# Altium PCB Solens.PcbDoc (part 3 of 3)
Units mil, origin at the board's own origin, x right, y up, seen from the top; angles counter-clockwise.
Board outline 5511.81 x 2755.91 mil, 4 copper layers (Top Layer, Signal Layer 2, Signal Layer 1, Bottom Layer), stack 65.08 mil thick; 208 components, 216 nets, 806 pads, 433 vias.
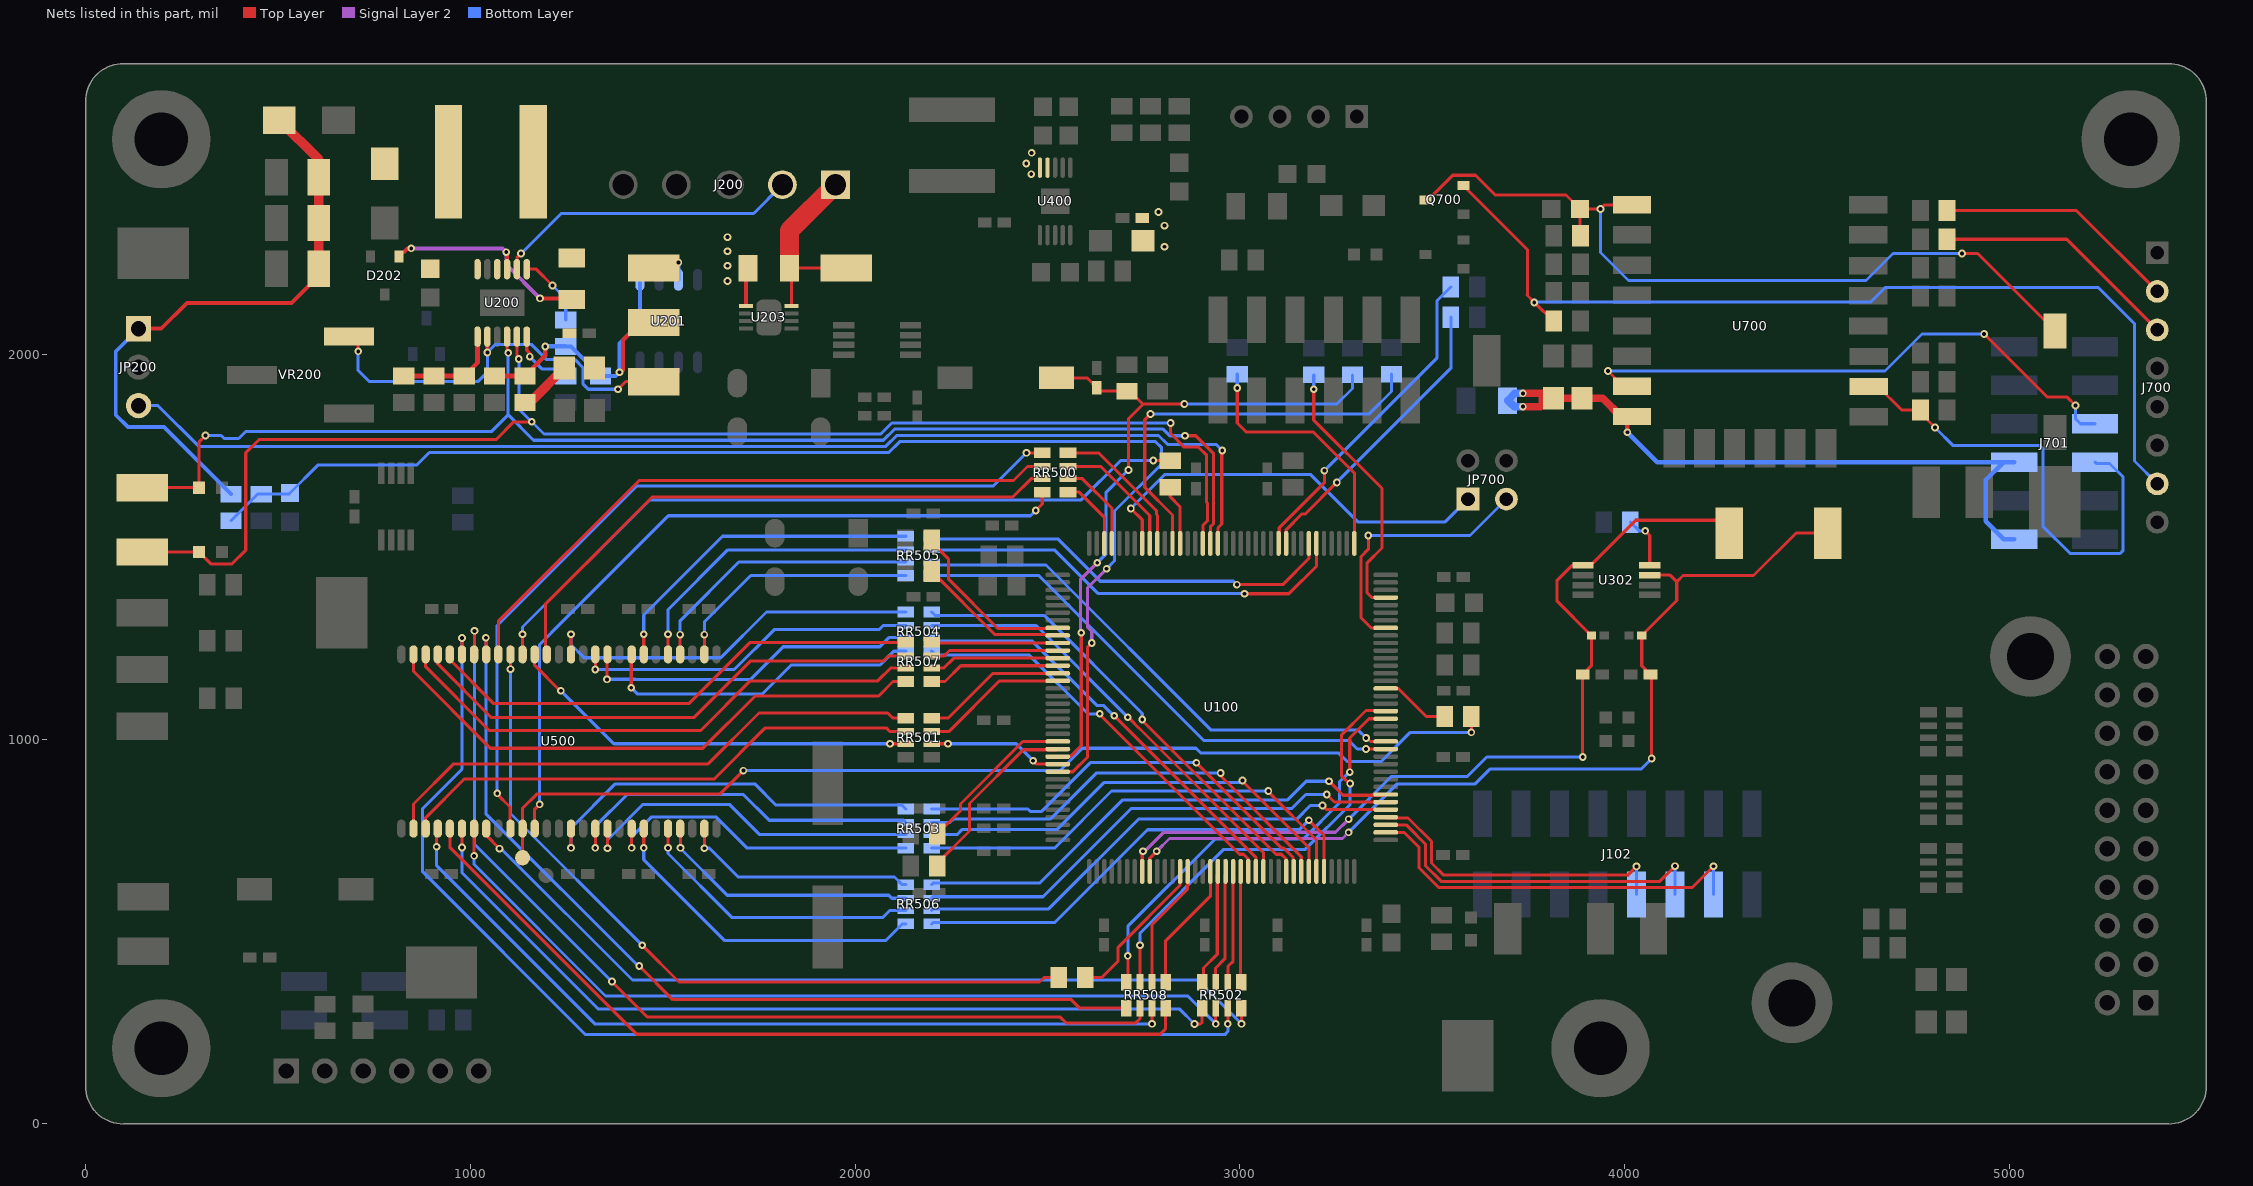
[diagram p5: the nets of this part, all layers, seen from the top]

## Via types
v1: diameter 20, hole 10, Top Layer to Bottom Layer, 392 vias
v2: diameter 20, hole 10, Top Layer to Bottom Layer, tented both sides, 14 vias
v3: diameter 47.24, hole 23.62, Top Layer to Bottom Layer, 13 vias
v4: diameter 24, hole 8, Top Layer to Bottom Layer, 10 vias
v5: diameter 20, hole 10, Top Layer to Bottom Layer, tented top, 4 vias

## Nets (pads, with @x,y where several pads share a name; then routed paths per layer and width w, separated by ;. In a path a pad name is that pad's centre, name@x,y a point inside that pad or via, vN(x,y) a via of type N, cw(c..) or ccw(c..) an arc to the next point about the centre after c; other vN are vias at no path point) (continued)
NetSJ200_1: SJ200.1 U200.6 | length 165.7
  Top Layer w8: U200.6@1146.65,2046.26 1146.65,2010.82 1154.58,2002.89 v1(1154.58,1994.24)
  Bottom Layer w8: v1(1154.58,1994.24) 1187.21,1961.61 1226.38,1961.61 SJ200.1@1244.09,1943.9
NetSJ201_1: SJ201.1 U200.7 | length 188.3
  Top Layer w8: U200.7@1146.65,2221.46 1171.26,2221.46 v1(1213.58,2179.13)
  Bottom Layer w8: v1(1213.58,2179.13) 1248.03,2144.69 SJ201.1@1248.03,2089.57
NetSJ301_1: SJ301.1 U302.8 | length 142.2
  Top Layer w8: v1(4053.15,1541.34) 4064.96,1529.53 U302.8@4064.96,1451.77
  Bottom Layer w8: SJ301.1@4014.76,1563.98 4037.4,1541.34 v1(4053.15,1541.34)
NRST: C124.1 R107.2 SJ108.1 SW101.1 U100.25 | length 1878.6
  Top Layer w8: SW101.1@2523.62,1938.98 2602.36,1938.98 C124.1@2627.95,1913.39 2636.81,1904.53 R107.2@2706.69,1904.53 2713.58,1904.53 2747.24,1870.87 ; U100.25@2526.57,954.72 2558.75,954.72 2587.6,983.58 v1(2587.6,1276.57) ; v1(2710.63,1699.8) 2710.63,1832.68 2748.03,1870.08 2747.24,1870.87 ; v1(2855.5,1870.87) 2747.24,1870.87
  Signal Layer 2 w8: v1(2587.6,1276.57) 2585.94,1278.23 2585.94,1415.98 2628.87,1458.91 v1(2629.41,1458.38)
  Bottom Layer w8: v1(2629.41,1458.38) 2651.57,1480.54 2651.57,1640.75 v1(2710.63,1699.8) ; v1(2855.5,1870.87) 3251.78,1870.87 3292.32,1911.42 SJ108.1@3292.32,1946.85
NTC: J200.2 U200.8 | length 799
  Top Layer w8: U200.8@1121.06,2221.46 1121.06,2250.98 1132.1,2262.02 v1(1131.68,2262.02)
  Bottom Layer w8: v1(1131.68,2262.02) 1132.1,2262.02 1236.22,2366.14 1736.22,2366.14 J200.2@1811.02,2440.94
PB13: J102.3 U100.74 | length 1038.4
  Top Layer w8: U100.74@3378.94,757.87 3426.47,757.87 3465.84,718.5 3465.84,665.08 3516.27,614.65 4175.68,614.65 v1(4230.71,669.69)
  Bottom Layer w8: J102.3@4230.71,596.46 v1(4230.71,669.69)
PB14: J102.5 U100.75 | length 935.4
  Top Layer w8: U100.75@3378.94,777.56 3432.1,777.56 3481.84,727.81 3481.84,671.71 3522.9,630.65 4091.28,630.65 v1(4130.71,670.08)
  Bottom Layer w8: J102.5@4130.71,596.46 v1(4130.71,670.08)
PB15: J102.7 U100.76 | length 829.5
  Top Layer w8: U100.76@3378.94,797.24 3380.81,795.37 3436.92,795.37 3497.84,734.44 3497.84,678.34 3529.53,646.65 4007.87,646.65 v1(4030.71,669.49)
  Bottom Layer w8: J102.7@4030.71,596.46 v1(4030.71,669.49)
PH0-OSC_IN: SJ102.1 U100.23 | length 422.8
  Top Layer w8: SJ102.1@2213.58,753.94 2273.62,813.98 2273.62,831.69 2436.02,994.09 U100.23@2526.57,994.09
PH1-OSC_OUT: R103.1 U100.24 | length 485.1
  Top Layer w8: R103.1@2213.58,670.28 2213.58,677.77 2297.24,761.43 2297.24,832.69 2437.09,972.53 2524.7,972.53 U100.24@2526.57,974.41
PH14-OSC32_IN: SJ101.1 U100.8 | length 462.8
  Top Layer w8: SJ101.1@2198.82,1522.64 2200.07,1521.39 2200.07,1510.56 2243.11,1467.52 2243.11,1415.35 2370.9,1287.56 2524.77,1287.56 U100.8@2526.57,1289.37
PH15-OSC32_OUT: SJ100.1 U100.9 | length 396.7
  Top Layer w8: SJ100.1@2198.82,1436.02 2363.28,1271.56 2524.7,1271.56 U100.9@2526.57,1269.69
PROG_RXD: J700.3 R709.2 | length 643.8
  Top Layer w8: R709.2@4837.6,2299.21 5148.43,2299.21 J700.3@5383.86,2063.78
PROG_TXD: J700.2 R707.2 | length 633.3
  Top Layer w8: R707.2@4837.6,2374.02 5173.62,2374.02 J700.2@5383.86,2163.78
PV_SHDN_L: JP200.3 U100.127 | length 3133.8
  Top Layer w8: U100.127@2942.91,1508.86 2942.91,1549.23 2952.76,1559.08 2952.76,1749.02 2953.83,1750.09 v1(2953.88,1750.09)
  Bottom Layer w8: JP200.3@137.8,1866.93 188.19,1866.93 294.16,1760.96 2079.86,1760.96 2108.27,1789.37 2788.39,1789.37 2811.66,1766.09 2937.88,1766.09 v1(2953.88,1750.09)
PV_VIN_SENS: C207.1 R206.2 R208.1 U100.27 | length 3496.8
  Top Layer w8: U100.27@2526.57,915.35 2565.94,915.35 2604.33,953.74 2604.33,1239.43 v1(2614.97,1250.07)
  Signal Layer 2 w8: v1(2614.97,1250.07) 2614.97,1280.31 2603.6,1291.69 2603.6,1392.97 2647.01,1436.38 v1(2653.54,1442.91)
  Bottom Layer w8: R206.2@377.95,1567.91 446.85,1636.81 R208.1@456.69,1636.81 528.54,1636.81 C207.1@531.5,1639.76 604.68,1712.94 861.57,1712.94 893.58,1744.96 2087.48,1744.96 2115.89,1773.37 2780.76,1773.37 2796.61,1757.53 2796.61,1715.3 2674.21,1592.9 2674.21,1463.58 v1(2653.54,1442.91)
PWR_CHRG_L: D203.2 TP208.1 U100.128 U200.4 | length 3446.1
  Top Layer w8: TP208.1@147.64,1653.54 D203.2@295.28,1653.54 295.28,1772.64 v1(312.01,1789.37) ; U200.4@1095.47,2046.26 1095.47,2006.88 v1(1098.42,2003.93) ; v1(2857.42,1788.47) v1(2857.42,1788.47) 2885.29,1788.53 2931.7,1742.12 2931.7,1560.65 2923.23,1552.18 U100.128@2923.23,1508.86
  Bottom Layer w8: v1(312.01,1789.37) 352.36,1789.37 360.49,1781.24 397.91,1781.24 415.89,1799.21 1054.73,1799.21 1098.42,1842.9 ; v1(1098.42,2003.93) 1098.42,1842.9 ; v1(2857.42,1788.47) 2817.83,1788.47 2800.45,1805.85 2102.12,1805.85 2073.23,1776.96 1164.36,1776.96 1098.42,1842.9
PWR_FAULT_L: D204.2 TP209.1 U100.129 U200.5 | length 3627.9
  Top Layer w8: TP209.1@147.64,1486.22 D204.2@295.28,1486.22 325.79,1455.71 380.91,1455.71 416.34,1491.14 416.34,1744.09 450.79,1778.54 1066.94,1778.54 1113.2,1824.8 v1(1159.45,1824.8) ; U200.5@1121.06,2046.26 1121.06,1993.1 v1(1125.98,1988.18) ; v1(2819.88,1821.85) 2819.88,1794.29 2855.31,1758.86 2892.33,1758.86 2913.39,1737.81 2913.39,1615.76 2915.7,1613.44 2915.7,1567.28 2903.54,1555.12 U100.129@2903.54,1508.86
  Bottom Layer w8: v1(1125.98,1988.18) 1125.98,1858.27 1191.29,1792.96 2066.6,1792.96 2095.49,1821.85 v1(2819.88,1821.85)
RST_L: C700.1 Q700.3 R700.1 SW700.2 U700.1 | length 2110.8
  Top Layer w8: Q700.3@3482.28,2401.57 3489.17,2401.57 3553.15,2465.55 3612.2,2465.55 3663.39,2414.37 3847.44,2414.37 C700.1@3883.86,2377.95 ; R700.1@3884.84,2308.05 3883.86,2309.03 C700.1@3883.86,2377.95 ; U700.1@4018.87,2388.56 3947.61,2388.56 v1(3937.01,2377.95) C700.1@3883.86,2377.95 ; v1(4876.28,2261.97) 4917.16,2261.97 SW700.2@5118.11,2061.02
  Bottom Layer w8: v1(3937.01,2377.95) 3937.01,2264.76 4009.84,2191.93 4626.97,2191.93 4697.01,2261.97 v1(4876.28,2261.97)
RTS_L: J700.7 Q700.2 R711.2 | length 2514.9
  Top Layer w8: Q700.2@3580.71,2438.98 3747.05,2272.64 3747.05,2154.53 3746.17,2154.53 v1@3764.95,2135.75 ; v1(3764.95,2134.95) v1@3764.95,2135.75 ; R711.2@3815.94,2086.51 3815.06,2085.63 v1@3764.95,2135.75
  Bottom Layer w8: v1(3764.95,2134.95) 3764.95,2138.98 3766.79,2140.81 3771.27,2136.33 4639.28,2136.33 4676.48,2173.52 5231,2173.52 5324.8,2079.72 5324.8,1722.83 J700.7@5383.86,1663.78
RXD2: J701.5 U700.7 | length 1501
  Top Layer w8: v1(3956.69,1956.69) 3995.83,1917.56 U700.7@4018.87,1917.56 ; v1(4934.06,2053.15) 5098.43,1888.78 5149.61,1888.78 v1(5171.26,1867.13)
  Bottom Layer w8: v1(3956.69,1956.69) 4676.18,1956.69 4772.64,2053.15 v1(4934.06,2053.15) ; v1(5171.26,1867.13) 5171.26,1832.68 5184.25,1819.69 J701.5@5222.44,1819.69
SD_A0: RR507.8 U100.10 | length 328.5
  Top Layer w8: RR507.8@2198.82,1251.77 2200.59,1250 U100.10@2526.57,1250
SD_A0_T: RR507.1 U500.23 | length 1312
  Top Layer w8: U500.23@946.85,1220.47 946.85,1206.89 1061.22,1092.52 1567.91,1092.52 1727.17,1251.77 RR507.1@2131.89,1251.77
SD_A1: RR507.7 U100.11 | length 333.5
  Top Layer w8: RR507.7@2198.82,1216.54 2231.3,1216.54 2245.08,1230.31 U100.11@2526.57,1230.31
SD_A1_T: RR507.2 U500.24 | length 1365.5
  Top Layer w8: U500.24@915.35,1220.47 915.35,1195.87 1055.12,1056.1 1580.71,1056.1 1728.35,1203.74 2073.82,1203.74 2086.61,1216.54 RR507.2@2131.89,1216.54
SD_A2: RR507.6 U100.12 | length 338.4
  Top Layer w8: RR507.6@2198.82,1185.04 2230.31,1185.04 2255.91,1210.63 U100.12@2526.57,1210.63
SD_A2_T: RR507.3 U500.25 | length 1416.3
  Top Layer w8: U500.25@883.86,1220.47 883.86,1187.99 1049.21,1022.64 1598.43,1022.64 1727.36,1151.57 2059.06,1151.57 2092.52,1185.04 RR507.3@2131.89,1185.04
SD_A3: RR507.5 U100.13 | length 344.8
  Top Layer w8: RR507.5@2198.82,1149.8 2233.46,1149.8 2274.61,1190.94 U100.13@2526.57,1190.94
SD_A3_T: RR507.4 U500.26 | length 1478.4
  Top Layer w8: U500.26@852.36,1220.47 852.36,1176.18 1052.17,976.38 1604.33,976.38 1740.16,1112.2 2061.02,1112.2 2098.62,1149.8 RR507.4@2131.89,1149.8
SD_A4: RR501.8 U100.14 | length 375.9
  Top Layer w8: RR501.8@2198.82,1054.92 2241.93,1054.92 2358.27,1171.26 U100.14@2526.57,1171.26
SD_A4_T: RR501.1 U500.29 | length 1446.7
  Top Layer w8: U500.29@852.36,767.72 852.36,831.69 956.69,936.02 1618.11,936.02 1750,1067.91 2084.65,1067.91 2097.64,1054.92 RR501.1@2131.89,1054.92
SD_A5: RR501.7 U100.15 | length 382.4
  Top Layer w8: RR501.7@2198.82,1019.69 2243.11,1019.69 2375,1151.57 U100.15@2526.57,1151.57
SD_A5_T: RR501.2 U500.30 | length 1377.3
  Top Layer w8: U500.30@883.86,767.72 883.86,796.26 984.25,896.65 1633.86,896.65 1766.73,1029.53 2080.71,1029.53 2090.55,1019.69 RR501.2@2131.89,1019.69
SD_A6: RR508.6 U100.50 | length 320.3
  Top Layer w8: RR508.6@2771.65,368.11 2771.65,517.72 2863.82,609.88 2863.82,648.08 U100.50@2862.3,649.61
SD_A6_T: RR508.3 U500.31 | length 2186.2
  Top Layer w8: v1(912.4,720.47) 912.4,754.92 917.32,759.84 913.39,763.78 916.34,766.73 U500.31@915.35,767.72 U500.31@915.35,781.68 ; v1(2771.65,260.24) RR508.3@2771.65,301.18
  Bottom Layer w8: v1(912.4,720.47) 912.4,671.26 1323.43,260.24 v1(2771.65,260.24)
SD_A7: RR508.5 U100.53 | length 337.1
  Top Layer w8: RR508.5@2806.89,368.11 2806.89,476.18 2923.82,593.11 2923.82,655.9 U100.53@2923.23,656.5
SD_A7_T: RR508.4 U500.32 | length 2169.4
  Top Layer w8: U500.32@946.85,767.72 946.85,718.89 1432.47,233.27 2792.32,233.27 2806.89,247.83 RR508.4@2806.89,301.18
SD_A8: RR502.8 U100.54 | length 297.8
  Top Layer w8: RR502.8@2901.77,368.11 2905.51,371.85 2905.51,405.51 2941.04,441.04 U100.54@2941.04,649.61
SD_A8_T: RR502.1 U500.33 | length 2258.3
  Top Layer w8: v1(978.35,718.5) U500.33@978.35,767.72 U500.33@978.35,785.82 ; v1(2881.89,259.84) 2897.64,259.84 2901.77,263.98 RR502.1@2901.77,301.18
  Bottom Layer w8: v1(978.35,718.5) 978.35,652.56 1331.69,299.21 2842.52,299.21 v1(2881.89,259.84)
SD_A9: RR502.7 U100.55 | length 291.3
  Top Layer w8: RR502.7@2937.01,368.11 2937.01,405.51 2960.72,429.22 U100.55@2960.72,649.61
SD_A9_T: RR502.2 U500.34 | length 2233.1
  Top Layer w8: v1(1009.84,696.85) U500.34@1009.84,767.72 ; v1(2937.01,260.24) RR502.2@2937.01,301.18
  Bottom Layer w8: v1(1009.84,696.85) 1009.84,674.21 1351.38,332.68 2864.57,332.68 v1(2937.01,260.24)
SD_A10: RR502.6 U100.56 | length 321.1
  Top Layer w8: RR502.6@2968.5,368.11 2968.5,409.45 2982.28,423.23 U100.56@2982.28,647.73 ; U100.56@2981.57,624.64 2980.41,625.8 2980.41,645.85 U100.56@2982.28,647.73 ; U100.56@2982.28,656.5 U100.56@2982.28,647.73 ; U100.56@2984.16,649.61 U100.56@2982.28,647.73
SD_A10_T: RR502.3 U500.22 | length 3024.1
  Top Layer w8: U500.22@978.35,1220.47 v1(978.35,1262.8) ; v1(2968.5,260.24) RR502.3@2968.5,301.18
  Bottom Layer w8: v1(978.35,1262.8) 978.35,922.24 875.98,819.88 875.98,655.51 1299.21,232.28 2960.63,232.28 2968.5,240.16 v1(2968.5,260.24)
SD_A11: RR502.5 U100.57 | length 289.1
  Top Layer w8: U100.57@3001.97,656.5 3001.97,369.88 RR502.5@3003.74,368.11
SD_A11_T: RR502.4 U500.35 | length 2224.2
  Top Layer w8: U500.35@1041.34,767.72 1041.34,750 v1(1075.79,715.55) ; RR502.4@3003.74,301.18 3003.74,260.43 v1(3003.94,260.24)
  Bottom Layer w8: v1(1075.79,715.55) 1079.72,715.55 1421.26,374.02 2890.16,374.02 v1(3003.94,260.24)
SD_BA0: RR508.8 U100.89 | length 1156.5
  Top Layer w8: RR508.8@2704.92,368.11 2708.66,371.84 v1(2708.66,437.01) ; v1(3285.43,914.37) 3285.43,1002.95 3335.63,1053.15 U100.89@3378.94,1053.15 3377.95,1054.13 U100.89@3347.75,1054.13
  Bottom Layer w8: v1(2708.66,437.01) 2708.66,513.77 2935.04,740.16 3164.37,740.16 3258.86,834.65 3258.86,889.38 3283.85,914.37 v1(3285.43,914.37)
SD_BA0_T: RR508.1 U500.20 | length 2375.1
  Top Layer w8: v1(1040.35,1263.78) 1040.35,1221.46 U500.20@1041.34,1220.47 ; v1(1438.98,410.43) 1526.32,323.09 2561.76,323.09 2583.66,301.18 RR508.1@2704.92,301.18
  Bottom Layer w8: v1(1040.35,1263.78) 1040.35,806.1 1436.02,410.43 v1(1438.98,410.43)
SD_BA1: RR508.7 U100.90 | length 1152.2
  Top Layer w8: RR508.7@2740.16,368.11 v1(2740.16,464.57) ; v1(3286.42,884.84) v1@3286.42,882.27 ; U100.90@3378.94,1072.83 3377.06,1074.71 3327.67,1074.71 3263.43,1010.48 3263.43,905.26 v1@3286.42,882.27 ; v1@3286.42,882.27 3286.42,881.51 3286.8,881.89 v1@3286.42,882.27
  Bottom Layer w8: v1(2740.16,464.57) 2740.15,496.06 2957.68,713.58 3169.67,713.58 3286.42,830.33 v1(3286.42,884.84)
SD_BA1_T: RR508.2 U500.21 | length 2572.9
  Top Layer w8: U500.21@1009.84,1220.47 1012.82,1223.45 1010.83,1225.44 v1(1010.83,1281.5) ; v1(1368.11,370.08) 1460.63,277.56 2533.46,277.56 2548.23,262.8 2729.33,262.8 2740.16,273.62 RR508.2@2740.16,301.18
  Bottom Layer w8: v1@1010.83,1283.42 v1(1010.83,1281.5) 1010.83,727.36 v1(1368.11,370.08)
SD_CKE1: RR500.8 U100.135 | length 378.1
  Top Layer w8: RR500.8@2553.15,1743.9 2633.07,1743.9 2783.21,1593.76 2783.21,1583.92 2785.43,1581.7 U100.135@2785.43,1508.86
SD_CKE1_T: RR500.1 U500.37 | length 2144.2
  Top Layer w8: v1(1069.88,859.25) 1069.88,857.28 1103.35,823.82 1103.35,768.7 U500.37@1104.33,767.72 ; v1(2445.28,1744.09) 2445.47,1743.9 RR500.1@2486.22,1743.9
  Bottom Layer w8: v1(1069.88,859.25) 1069.88,1295.28 1433.07,1658.46 2359.65,1658.46 v1(2445.28,1744.09)
SD_CLK: R502.1 U100.93 | length 183.7
  Top Layer w8: U100.93@3378.94,1131.89 3411.42,1131.89 3484.25,1059.06 R502.1@3532.48,1059.06
SD_CLK_T: R502.2 TP501.1 U500.38 | length 2745.7
  Top Layer w8: TP501.1@1135.83,691.93 U500.38@1135.83,767.72 1135.83,820.48 1172.63,857.28 1648.62,857.28 v1(1709.65,918.31) ; v1(3601.38,1017.72) R502.2@3601.38,1059.06
  Bottom Layer w8: v1(1709.65,918.31) 2532.48,918.31 2590.55,976.38 2885.83,976.38 2897.64,964.57 3255.91,964.57 3278.54,941.93 3367.13,941.93 3442.91,1017.72 v1(3601.38,1017.72)
SD_D0: RR505.8 U100.85 | length 1366.9
  Top Layer w8: v1(3327.76,974.41) U100.85@3378.94,974.41
  Bottom Layer w8: RR505.8@2198.82,1425.39 2477.17,1425.39 2906.5,996.06 3283.46,996.06 3305.12,974.41 v1(3327.76,974.41)
SD_D0_T: RR505.1 U500.2 | length 657.9
  Top Layer w8: U500.2@1608.27,1220.47 v1(1608.27,1271.65)
  Bottom Layer w8: v1(1608.27,1271.65) 1608.27,1304.73 1728.93,1425.39 RR505.1@2131.89,1425.39
SD_D1: RR505.7 U100.86 | length 1373.4
  Top Layer w8: v1(3327.93,1003.14) 3330.14,1003.14 3339.18,994.09 U100.86@3378.94,994.09
  Bottom Layer w8: RR505.7@2198.82,1460.63 2206.69,1452.76 2496.06,1452.76 2925.2,1023.62 3307.45,1023.62 v1(3327.93,1003.14)
SD_D1_T: RR505.2 U500.4 | length 737.4
  Top Layer w8: U500.4@1545.28,1220.47 v1(1545.28,1271.65)
  Bottom Layer w8: v1(1545.28,1271.65) 1545.28,1308.07 1697.83,1460.63 RR505.2@2131.89,1460.63
SD_D2: RR505.6 U100.114 | length 1135.7
  Top Layer w8: v1(3011.81,1377.95) 3126.97,1377.95 3198.82,1449.8 U100.114@3198.82,1508.86
  Bottom Layer w8: RR505.6@2198.82,1492.13 2517.72,1492.13 2630.91,1378.94 v1@3011.81,1378.94
SD_D2_T: RR505.3 U500.5 | length 798.7
  Top Layer w8: U500.5@1513.78,1220.47 v1(1513.78,1272.64)
  Bottom Layer w8: v1(1513.78,1272.64) 1513.78,1336.61 1669.29,1492.13 RR505.3@2131.89,1492.13
SD_D3: RR505.5 U100.115 | length 1099.9
  Top Layer w8: v1(2992.13,1401.57) 3111.22,1401.57 3179.13,1469.49 U100.115@3179.13,1508.86
  Bottom Layer w8: RR505.5@2198.82,1527.36 2205.51,1520.67 2526.57,1520.67 2636.81,1410.43 2983.27,1410.43 v1(2992.13,1401.57)
SD_D3_T: RR505.4 U500.7 | length 868.2
  Top Layer w8: U500.7@1450.79,1220.47 v1(1450.79,1272.64)
  Bottom Layer w8: v1(1450.79,1272.64) 1450.79,1322.83 1655.32,1527.36 RR505.4@2131.89,1527.36
SD_D4: RR504.8 U100.58 | length 1079.8
  Top Layer w8: v1(2635.83,1065.94) 2635.83,1063.98 2998.83,700.98 3009.34,700.98 3019.78,690.55 3019.78,689.87 3021.65,687.99 U100.58@3021.65,656.5
  Bottom Layer w8: RR504.8@2198.82,1228.54 2208.86,1218.5 2452.76,1218.5 2605.31,1065.94 v1(2635.83,1065.94)
SD_D4_T: RR504.1 U500.8 | length 853.7
  Top Layer w8: v1(1418.31,1133.86) 1418.31,1219.49 U500.8@1419.29,1220.47
  Bottom Layer w8: v1(1418.31,1133.86) 1435.04,1117.13 1757.87,1117.13 1833.66,1192.91 2064.96,1192.91 2100.59,1228.54 RR504.1@2131.89,1228.54
SD_D5: RR504.7 U100.59 | length 1120.6
  Top Layer w8: v1(2673.23,1061.02) 3041.34,692.91 U100.59@3041.34,656.5
  Bottom Layer w8: RR504.7@2198.82,1263.78 2198.82,1254.92 2460.63,1254.92 2627.61,1087.94 2644.94,1087.94 2671.86,1061.02 v1(2673.23,1061.02)
SD_D5_T: RR504.2 U500.10 | length 888.7
  Top Layer w8: v1(1355.32,1155.51) 1355.32,1215.55 1353.35,1217.52 U500.10@1356.3,1220.47
  Bottom Layer w8: v1(1355.32,1155.51) 1355.66,1155.86 1427.42,1155.86 1427.77,1155.51 1728.35,1155.51 1812.99,1240.16 2063.98,1240.16 2087.6,1263.78 RR504.2@2131.89,1263.78
SD_D6: RR504.6 U100.60 | length 1156
  Top Layer w8: v1(2708.66,1057.09) 2709.65,1057.09 2724.06,1042.67 2724.06,1042.07 2736.95,1029.18 2737.55,1029.18 3061.02,705.71 U100.60@3061.02,656.5
  Bottom Layer w8: RR504.6@2198.82,1295.28 2470.47,1295.28 v1(2708.66,1057.09)
SD_D6_T: RR504.3 U500.11 | length 893.7
  Top Layer w8: v1(1324.8,1181.1) U500.11@1324.8,1220.47
  Bottom Layer w8: v1(1324.8,1181.1) 1686.02,1181.1 1789.56,1284.64 2062.2,1284.64 2072.83,1295.28 RR504.3@2131.89,1295.28
SD_D7: RR504.5 U100.63 | length 1230
  Top Layer w8: v1(2746.06,1051.18) 2746.06,1048.61 3093.7,700.98 3107.77,700.98 3120.08,688.67 U100.63@3120.08,656.5
  Bottom Layer w8: RR504.5@2198.82,1330.51 2207.48,1321.85 2491.14,1321.85 2746.06,1066.93 v1(2746.06,1051.18)
SD_D7_T: RR504.4 U500.13 | length 1019.3
  Top Layer w8: U500.13@1256.89,1225.39 U500.13@1261.81,1220.47 v1(1261.81,1272.64)
  Bottom Layer w8: v1(1261.81,1272.64) 1261.81,1246.06 1296.26,1211.61 1650.59,1211.61 1769.49,1330.51 RR504.4@2131.89,1330.51
SD_D8: RR503.1 U100.64 | length 1133.4
  Top Layer w8: v1(2886.81,938.98) 3108.81,716.98 3114.4,716.98 3137.89,693.49 3137.89,658.37 U100.64@3139.76,656.5
  Bottom Layer w8: RR503.1@2198.82,818.7 2449.39,818.7 2455.45,812.64 2484.88,812.64 2611.22,938.98 v1(2886.81,938.98)
SD_D8_T: RR503.8 U500.42 | length 1046.1
  Top Layer w8: v1(1261.81,717.52) U500.42@1261.81,767.72
  Bottom Layer w8: v1(1261.81,717.52) 1261.81,768.7 1376.97,883.86 1739.17,883.86 1794.29,828.74 2121.85,828.74 RR503.8@2131.89,818.7
SD_D9: RR503.2 U100.65 | length 1147.1
  Top Layer w8: v1(2949.8,912.4) 2949.8,904.2 3159.45,694.55 U100.65@3159.45,656.5
  Bottom Layer w8: RR503.2@2198.82,783.46 2246.06,783.46 2254.92,792.32 2506.89,792.32 2626.24,911.67 2949.07,911.67 v1(2949.8,912.4)
SD_D9_T: RR503.7 U500.44 | length 977.8
  Top Layer w8: v1(1324.8,717.52) U500.44@1324.8,767.72
  Bottom Layer w8: v1(1324.8,717.52) 1324.8,773.62 1407.48,856.3 1709.65,856.3 1776.57,789.37 2125.98,789.37 RR503.7@2131.89,783.46
SD_D10: RR503.3 U100.66 | length 1177
  Top Layer w8: v1(3006.89,892.72) 3004.92,892.72 3179.13,718.5 U100.66@3179.13,656.5
  Bottom Layer w8: RR503.3@2198.82,751.97 2264.76,751.97 2278.54,765.75 2525.59,765.75 2647.64,887.8 2950.19,887.8 2950.53,887.45 3001.62,887.45 v1(3006.89,892.72)
SD_D10_T: RR503.6 U500.45 | length 919.4
  Top Layer w8: v1(1356.3,716.54) U500.45@1356.3,767.72
  Bottom Layer w8: v1(1356.3,716.54) 1356.3,738.19 1448.82,830.71 1673.23,830.71 1751.97,751.97 RR503.6@2131.89,751.97
SD_D11: RR503.4 U100.67 | length 1194.9
  Top Layer w8: v1@3073.82,863.19 3198.82,738.19 U100.67@3198.82,656.5
  Bottom Layer w8: RR503.4@2198.82,716.73 2517.91,716.73 2666.34,865.16 v1(3073.82,865.16)
SD_D11_T: RR503.5 U500.47 | length 860.3
  Top Layer w8: v1(1419.29,717.52) U500.47@1419.29,767.72 U500.47@1419.29,781.3
  Bottom Layer w8: v1(1419.29,717.52) 1419.29,746.06 1471.46,798.23 1637.8,798.23 1719.29,716.73 RR503.5@2131.89,716.73
SD_D12: RR506.8 U100.68 | length 1241.4
  Top Layer w8: v1(3179.13,789.37) 3218.5,750 3218.5,741.74 3218.15,741.39 3218.15,656.85 U100.68@3218.5,656.5
  Bottom Layer w8: RR506.8@2198.82,519.88 2202.76,523.82 2518.9,523.82 2759.84,764.76 3154.53,764.76 v1(3179.13,789.37)
SD_D12_T: RR506.1 U500.48 | length 867.1
  Top Layer w8: v1(1450.79,717.52) U500.48@1450.79,767.72
  Bottom Layer w8: v1(1450.79,717.52) 1450.79,687.01 1661.42,476.38 2078.74,476.38 2122.24,519.88 RR506.1@2131.89,519.88
SD_D13: RR506.7 U100.77 | length 1297.5
  Top Layer w8: v1(3214.55,827.76) 3225.38,816.93 U100.77@3378.94,816.93
  Bottom Layer w8: RR506.7@2198.82,555.12 2202.76,559.06 2502.95,559.06 2736.22,792.32 3147.64,792.32 3183.07,827.76 v1(3214.55,827.76)
SD_D13_T: RR506.2 U500.50 | length 765.7
  Top Layer w8: v1(1513.78,717.52) 1513.78,751.97 1511.81,753.94 1516.73,758.86 1512.8,762.8 1514.76,764.76 1513.78,765.75 1514.76,766.73 U500.50@1513.78,767.72
  Bottom Layer w8: v1(1513.78,717.52) 1513.78,702.76 1679.48,537.06 2072.49,537.06 2090.55,555.12 RR506.2@2131.89,555.12
SD_D14: RR506.6 U100.78 | length 1300
  Top Layer w8: v1(3225.55,856.34) 3245.28,836.61 U100.78@3378.94,836.61
  Bottom Layer w8: RR506.6@2198.82,586.61 2202.76,590.55 2488.19,590.55 2717.52,819.88 3134.84,819.88 3171.3,856.34 v1(3225.55,856.34)
SD_D14_T: RR506.3 U500.51 | length 695.4
  Top Layer w8: U500.51@1545.28,767.72 1547.24,765.75 1542.37,760.87 1546.26,756.99 v1(1546.26,717.52)
  Bottom Layer w8: v1(1546.26,717.52) 1546.26,715.93 1667.71,594.49 2087.6,594.49 2095.47,586.61 RR506.3@2131.89,586.61
SD_D15: RR506.5 U100.79 | length 1307.8
  Top Layer w8: v1(3231.3,890.75) 3237.8,884.25 3238.6,884.25 3251.49,871.36 3251.49,870.56 3267.63,854.42 3377.06,854.42 U100.79@3378.94,856.3
  Bottom Layer w8: RR506.5@2198.82,621.85 2202.76,625.79 2479.13,625.79 2695.87,842.52 3124.02,842.52 3172.24,890.75 v1(3231.3,890.75)
SD_D15_T: RR506.4 U500.53 | length 614.8
  Top Layer w8: v1(1608.27,716.54) 1608.27,765.75 1607.28,766.73 U500.53@1608.27,767.72
  Bottom Layer w8: v1(1608.27,716.54) 1621.45,716.54 1696.25,641.73 2102.36,641.73 2122.24,621.85 RR506.4@2131.89,621.85
SD_NBL0: RR500.6 U100.141 | length 237.5
  Top Layer w8: RR500.6@2553.15,1677.17 2590.55,1677.17 2667.32,1600.39 U100.141@2667.32,1508.86
SD_NBL0_T: RR500.3 U500.15 | length 1558
  Top Layer w8: U500.15@1198.82,1220.47 1195.87,1223.43 1195.87,1352.36 1473.43,1629.92 2410.43,1629.92 2457.68,1677.17 RR500.3@2486.22,1677.17
SD_NBL1: RR500.5 U100.142 | length 189.4
  Top Layer w8: RR500.5@2553.15,1641.93 2582.48,1641.93 2647.64,1576.77 U100.142@2647.64,1508.86
SD_NBL1_T: RR500.4 U500.39 | length 1971.7
  Top Layer w8: U500.39@1167.32,767.72 1167.32,817.91 v1(1180.12,830.71) ; v1(2469.49,1594.49) 2486.22,1611.22 RR500.4@2486.22,1641.93
  Bottom Layer w8: v1(1180.12,830.71) 1180.12,1246.06 1239.17,1305.12 1514.76,1580.71 2455.71,1580.71 v1(2469.49,1594.49)
SD_NCAS: R501.1 U100.132 | length 156.3
  Top Layer w8: R501.1@2818.9,1654.53 2818.9,1629.92 2844.49,1604.33 U100.132@2844.49,1508.86
SD_NCAS_T: R501.2 U500.17 | length 1938.6
  Top Layer w8: U500.17@1135.83,1220.47 v1(1135.83,1272.64) ; v1(2774.61,1724.41) 2806.1,1724.41 2812.01,1730.31 R501.2@2818.9,1723.43
  Bottom Layer w8: v1(1135.83,1272.64) 1135.83,1291.34 1465.55,1621.06 2586.62,1621.06 2689.97,1724.41 v1(2774.61,1724.41)
SD_NE1: RR500.7 U100.136 | length 337.8
  Top Layer w8: RR500.7@2553.15,1708.66 2638.4,1708.66 2765.75,1581.31 U100.136@2765.75,1508.86
SD_NE1_T: RR500.2 U500.19 | length 1665.8
  Top Layer w8: U500.19@1072.83,1220.47 1072.83,1306.1 1438.98,1672.24 2411.42,1672.24 2447.83,1708.66 RR500.2@2486.22,1708.66
SD_NRAS: R500.1 U100.49 | length 402.3
  Top Layer w8: R500.1@2598.43,380.91 2640.75,380.91 2683.41,423.57 2683.41,459 2844.49,620.08 U100.49@2844.49,656.5
SD_NRAS_T: R500.2 U500.18 | length 2044.6
  Top Layer w8: v1(1104.33,1182.09) U500.18@1104.33,1220.47 U500.18@1104.33,1240.16 ; v1(1446.85,464.57) 1542.32,369.09 2479.33,369.09 2491.14,380.91 R500.2@2529.53,380.91
  Bottom Layer w8: v1(1104.33,1182.09) 1104.33,807.09 v1(1446.85,464.57)
SD_NWE: RR501.6 U100.26 | length 351.2
  Top Layer w8: RR501.6@2198.82,988.19 v1(2241.14,988.19) v1@2242.13,987.2 ; v1(2462.6,943.9) 2471.46,935.04 U100.26@2526.57,935.04
  Bottom Layer w8: v1(2241.14,988.19) 2418.31,988.19 v1(2462.6,943.9)
SD_NWE_T: RR501.3 U500.16 | length 1077.5
  Top Layer w7.87: v1(2090.55,988.19) v1@2098.43,988.19
  Top Layer w8: U500.16@1167.32,1220.47 1167.32,1191.93 1233.27,1125.98 v1(1235.24,1125.98) ; v1@2098.43,988.19 RR501.3@2131.89,988.19
  Bottom Layer w8: v1(1235.24,1125.98) 1373.03,988.19 v1(2090.55,988.19)
SENSE: L200.2 R200.2 U200.10
SPECT0: C305.2 R308.2 TP304.1 U100.44 U302.1 | length 2329.2
  Top Layer w8: U100.44@2746.06,656.5 2746.06,706.69 v1(2748.03,708.66) ; v1(3890.75,953.74) C305.2@3890.75,1168.31 3913.39,1190.94 R308.2@3913.39,1269.69 3823.47,1359.6 3823.47,1412.06 3863.19,1451.77 U302.1@3891.73,1451.77 3911.42,1451.77 4028.54,1568.9 4238.19,1568.9 TP304.1@4271.65,1535.43
  Signal Layer 2 w8: v1(2748.03,708.66) 2752.35,708.66 2801.82,758.13 3248.28,758.13 v1(3282.48,792.32)
  Bottom Layer w8: v1(3282.48,792.32) 3393.7,903.54 3591.54,903.54 3641.73,953.74 v1(3890.75,953.74)
SPECT1: C304.1 R303.1 TP305.1 U100.45 U302.7 | length 2475.4
  Top Layer w8: U100.45@2765.75,656.5 2765.75,690.94 v1(2783.46,708.66) ; U302.7@4064.96,1426.18 4118.11,1426.18 4135.19,1409.1 ; v1(4069.88,949.8) 4069.88,1165.35 C304.1@4066.93,1168.31 4044.29,1190.94 R303.1@4044.29,1269.69 4135.19,1360.58 4135.19,1409.1 ; TP305.1@4527.56,1535.43 4444.88,1535.43 4334.65,1425.2 4151.28,1425.2 4135.19,1409.1
  Signal Layer 2 w8: v1(2783.46,708.66) 2816.93,742.13 3266.73,742.13 v1(3282.48,757.87)
  Bottom Layer w8: v1(3282.48,757.87) 3408.46,883.86 3611.22,883.86 3649.61,922.24 4042.32,922.24 v1(4069.88,949.8)
SW: C200.1 D200.2 L200.1 U200.12
SWCLK: SJ106.1 U100.109 | length 668
  Top Layer w8: v1(2993.11,1912.4) 2993.11,1821.85 3016.48,1798.48 3190.69,1798.48 3297.24,1691.93 U100.109@3297.24,1508.86
  Bottom Layer w8: v1(2993.11,1912.4) SJ106.1@2993.11,1948.82
SWDIO: SJ107.1 U100.105 | length 709.3
  Top Layer w8: v1(3191.93,1909.45) 3191.93,1828.94 3369.09,1651.77 3369.09,1497.05 3330.71,1458.66 3330.71,1379.92 3342.52,1368.11 U100.105@3378.94,1368.11
  Bottom Layer w8: v1(3191.93,1909.45) SJ107.1@3191.93,1946.85
SWO: SJ109.1 U100.133 | length 1067.7
  Top Layer w8: v1(2767.72,1844.83) 2752.61,1829.72 2752.61,1654.64 2824.8,1582.44 U100.133@2824.8,1508.86
  Bottom Layer w8: v1(2767.72,1844.83) 3334.99,1844.83 3393.7,1903.54 SJ109.1@3393.7,1948.82
TXD2: J701.7 R708.2 U700.16 | length 1245.6
  Top Layer w8: U700.16@4633.87,1916.56 4658.24,1916.56 4719.51,1855.29 R708.2@4768.7,1855.29 4768.7,1847.87 v1(4806.39,1810.18)
  Bottom Layer w8: v1@4806.39,1810.36 v1(4806.39,1810.18) 4853.77,1762.8 5078.74,1762.8 5086.61,1754.92 5086.61,1553.54 5157.47,1482.69 5287.41,1482.69 5294.44,1489.71 5294.44,1681.94 5293.8,1682.58 5259.84,1716.54 5225.59,1716.54 J701.7@5222.44,1719.69
VBAT: J200.1 R210.2 TP207.1 U203.8 | length 513
  Top Layer w8: U203.8@1834.65,2125.98 1834.65,2219.49 R210.2@1829.72,2224.41 TP207.1@1976.38,2224.41
  Top Layer w50: R210.2@1829.72,2224.41 1829.72,2321.85 J200.1@1948.82,2440.94
VBAT_INT: C204.1 C205.1 C206.1 C401.1 C402.1 D202.1 R200.1 R203.1 R210.1 TP203.1 U200.9 U201.3 U203.1 U400.9 U400.10 | length 852.6
  Top Layer w10: D202.1@814.96,2253.94 836.61,2275.59 v1(846.46,2275.59) ; v1(1093.5,2265.75) 1093.5,2260.82 1095.47,2258.85 U200.9@1095.47,2221.46 ; v1(1181.1,2145.67) R200.1@1260.83,2145.67 ; U203.1@1716.54,2125.98 R210.1@1716.54,2219.49
  Top Layer w25: R203.1@1141.73,1875 1154.53,1875 C205.1@1244.09,1964.57
  Signal Layer 2 w10: v1(846.46,2275.59) 1083.66,2275.59 v1(1093.5,2265.75) 1093.5,2233.27 v1(1181.1,2145.67)
  Bottom Layer w10: v1@1539.37,2240.16 v1(1540.75,2238.78) U201.3@1540.75,2193.9
  other v1: 1668.31,2190.94 1668.31,2230.31 1668.31,2268.06 1668.31,2304.77 2444.88,2496.06 2458.66,2523.62
  other v5: 2804.13,2279.53 2804.13,2334.65 2788.39,2370.08 2457.68,2468.5
VCC_ESP: C701.1 C702.1 J701.8 J701.12 SJ700.2 U700.8 | length 1833
  Top Layer w12: v1(4006.87,1797.56) 4006.87,1820.84 3989.15,1838.56 3990.18,1838.56 U700.8@4018.87,1838.56
  Top Layer w20: v1(3735.24,1864.17) 3780.51,1864.17 3785.43,1869.09 3785.43,1885.83 ; v1(3735.24,1898.62) 3786.42,1898.62 3785.43,1897.64 3785.43,1885.83 ; U700.8@3990.18,1838.56 3942.91,1885.83 C702.1@3888.78,1885.83 C701.1@3814.96,1885.83 3785.43,1885.83
  Bottom Layer w12: v1(4006.87,1797.56) 4084.74,1719.69 J701.8@4984.45,1719.69 ; J701.12@5012.44,1519.69 4985.24,1519.69 4938.44,1566.48 4938.44,1673.68 J701.8@4984.45,1719.69 ; J701.8@5012.44,1719.69 J701.8@4984.45,1719.69
  Bottom Layer w20: v1(3735.24,1864.17) 3713.58,1864.17 3707.68,1870.08 3706.69,1869.09 SJ700.2@3695.87,1879.92 3714.57,1898.62 v1(3735.24,1898.62)
VFB: R203.2 R205.2 R207.1 SJ201.2 TP205.1 U201.1 | length 860.1
  Top Layer w10: v1(1387.8,1953.74) 1391.32,1953.74 1396.45,1958.87 1396.45,2036.97 1442.15,2082.68 TP205.1@1476.38,2082.68
  Top Layer w12: R207.1@1062.99,1943.9 R203.2@1141.73,1943.9 1194.88,1997.05 v1(1194.88,2020.67)
  Bottom Layer w10: SJ201.2@1248.03,2020.67 1261.81,2020.67 R205.2@1338.58,1943.9 1377.95,1943.9 v1(1387.8,1953.74) ; v1@1391.73,1953.74 v1(1387.8,1953.74) ; U201.1@1440.75,2193.9 1440.75,2081.27 1387.8,2028.32 v1(1387.8,1953.74)
  Bottom Layer w12: v1(1194.88,2020.67) SJ201.2@1248.03,2020.67
VIN: C201.1 C202.1 C203.1 D201.2 JP200.1 R201.1 R202.1 R204.1 R206.1 U200.1 | length 1878.9
  Top Layer w10: JP200.1@137.8,2066.93 196.85,2066.93 263.78,2133.86 535.43,2133.86 606.3,2204.72 C203.1@606.3,2222.39
  Top Layer w12: R201.1@826.77,1943.9 R202.1@905.51,1943.9 R204.1@984.25,1943.9 1018.7,1978.35 U200.1@1018.7,2046.26
  Top Layer w25: D201.2@503.94,2608.27 606.3,2505.91 C201.1@606.3,2460.63 C202.1@606.3,2341.51 C203.1@606.3,2222.39
  Bottom Layer w10: JP200.1@137.8,2066.93 78.74,2007.87 78.74,1842.52 110.24,1811.02 203.74,1811.02 R206.1@377.95,1636.81
VINFB: TP204.1 U200.2 VR200.3 | length 1070.4
  Top Layer w8: VR200.3@685.04,2046.75 708.66,2023.12 v1(708.66,2007.87) ; v1(1383.86,1909.45) 1402.5,1928.09 1403.49,1928.09 1404.54,1929.13 TP204.1@1476.38,1929.13
  Top Layer w10: v1(1044.29,2004.92) U200.2@1044.29,2046.26
  Bottom Layer w8: v1(708.66,2007.87) 708.66,1958.25 737.78,1929.13 1019.68,1929.13 1044.29,1953.74 v1(1044.29,2004.92) 1065.3,2025.93 1158.51,2025.93 1197.42,1987.02 1271.1,1987.02 1292.32,1965.79 1292.32,1923.97 1306.85,1909.45 v1(1383.86,1909.45)
WIFI_GPIO4: R710.2 U100.118 | length 770.1
  Top Layer w8: U100.118@3120.08,1508.86 3120.08,1544.3 3161.41,1585.63 3170.28,1585.63 v1(3251.97,1667.32)
  Bottom Layer w8: v1(3251.97,1667.32) 3548.23,1963.58 R710.2@3548.23,2096.46
WIFI_GPIO16: R712.2 U100.119 | length 851.8
  Top Layer w8: U100.119@3100.39,1508.86 3102.27,1510.74 3102.27,1549.12 3219.49,1666.34 v1(3219.49,1697.83)
  Bottom Layer w8: v1(3219.49,1697.83) 3511.81,1990.16 3511.81,2138.78 R712.2@3548.23,2175.2
WIFI_RX: JP700.1 U100.137 | length 1091
  Top Layer w8: v1(2716.54,1599.41) 2746.06,1569.88 U100.137@2746.06,1508.86
  Bottom Layer w8: v1(2716.54,1599.41) 2805.31,1688.18 3182.88,1688.18 3306.1,1564.96 3533.46,1564.96 JP700.1@3592.52,1624.02
WIFI_TX: JP700.3 U100.101 | length 695.1
  Top Layer w8: v1(3333.66,1529.53) 3333.66,1493.42 3314.71,1474.47 3314.71,1367.39 3315.05,1367.05 3315.05,1314.87 3340.55,1289.37 U100.101@3378.94,1289.37
  Bottom Layer w8: v1(3333.66,1529.53) 3598.03,1529.53 JP700.3@3692.52,1624.02
pads on no net: D202.2 J100.1 J100.4 J100.5 J600.19 J600.20 J700.4 J700.5 J700.8 RR501.4 RR501.5 RR602.4 RR602.5 U100.1 U100.2 U100.3 U100.18 U100.19 U100.20 U100.21 U100.22 U100.28 U100.29 U100.41 U100.43 U100.46 U100.47 U100.48 U100.91 U100.92 U100.102 U100.103 U100.104 U100.111 U100.113 U100.116 U100.122 U100.123 U100.125 U100.134 U201.4 U201.5 U201.6 U201.7 U201.8 U300.3 U301.4 U700.2 U700.9 U700.10 U700.11 U700.12 U700.13 U700.14 U700.20 Y101.2 Y101.3 Y300.2 Y300.3
copper on no net: | length 661.4
  Top Layer w8: 82.68,807.09 744.09,807.09

## Polygon pours and split planes (outlines as drawn)
NetC403_2 on Signal Layer 2 "LT8608_NetC403_2" (solid, pour order 17): 2381.89,2685.04 2370.08,2673.23 2370.08,2598.43 2397.64,2570.87 2771.65,2570.87 2909.45,2433.07 2909.45,2362.2 2929.13,2342.52 3027.56,2342.52 3039.37,2354.33 3039.37,2535.43 2889.76,2685.04
VBAT_INT on Signal Layer 2 "LT3652_VBAT_INT" (solid, pour order 6): 1614.17,2185.04 1633.86,2165.35 1732.28,2165.35 1988.19,2165.35 2007.87,2185.04 2216.54,2185.04 2456.69,2425.2 2480.31,2448.82 2640.13,2448.82 2720.84,2368.11 2720.84,2332.31 2712.6,2324.07 2712.6,2260.83 2814.96,2260.83 2814.96,2381.89 2691.44,2505.41 2516.24,2505.41 2503.94,2517.72 2482.28,2539.37 2421.26,2539.37 2244.09,2362.2 1633.86,2362.21 1614.17,2342.52
3V3 on Signal Layer 2 "3V3 Plane 1" (solid, pour order 1): 49.21,1082.68 49.21,1771.65 1456.69,1771.65 1673.23,1988.19 1830.71,1988.19 2011.81,2169.29 2809.05,2169.29 3043.31,2169.29 3043.31,2706.7 3444.88,2706.69 3740.16,2411.42 4921.26,2411.42 5216.54,2706.69 5373.87,2706.69 cw(c5373.87,2617.97) 5462.6,2617.96 5462.6,137.94 cw(c5373.88,137.93) 5373.87,49.21 137.94,49.21 cw(c137.94,137.94) 49.21,137.94
GND on Signal Layer 1 "GND Plane" (solid, pour order 2): 137.94,2706.69 3444.88,2706.69 3740.16,2411.42 4921.26,2411.42 5216.54,2706.69 5373.87,2706.69 cw(c5373.87,2617.97) 5462.6,2617.96 5462.6,137.94 cw(c5373.87,137.94) 5373.87,49.21 137.94,49.21 cw(c137.94,137.94) 49.21,137.94 49.21,2617.96 cw(c137.94,2617.96)
VBAT_INT on Top Layer "LT8608_VBAT_INT_Top" (solid, pour order 16): 2814.96,2381.89 2814.96,2324.8 2814.96,2259.84 2712.6,2259.84 2712.6,2322.83 2720.47,2330.71 2720.47,2372.05 2749.02,2400.59 2796.26,2400.59
NetC403_2 on Top Layer "LT8608_NetC403_2" (solid, pour order 15): 2145.67,2685.04 2122.05,2661.42 2118.11,2657.48 2118.11,2610.24 2118.11,2602.36 2137.8,2582.68 2431.1,2582.68 2458.66,2610.24 2510.83,2610.24 2520.67,2620.08 2520.67,2630.91 2520.67,2651.57 2520.67,2672.24 2507.87,2685.04
VBAT_INT on Top Layer "LT8608_VBAT_INT_Top" (solid, pour order 14): 2503.94,2517.72 2503.94,2460.63 2492.13,2448.82 2442.91,2448.82 2431.1,2460.63 2431.1,2529.53 2437.99,2536.42 2485.24,2536.42
NetC400_2 on Top Layer "LT8608_NetC400_2" (solid, pour order 13): 2141.73,2495.08 2128.94,2482.28 2128.94,2348.77 2233.61,2244.09 2485.24,2244.09 2504.92,2263.78 2504.92,2286.42 2504.92,2333.66 2504.92,2352.36 2496.06,2361.22 2475.39,2361.22 2463.58,2373.03 2378.94,2457.68 2378.94,2478.35 2362.2,2495.08
NetC400_1 on Top Layer "LT8608_NetC400_1" (solid, pour order 12): 2484.25,2334.65 2484.25,2287.4 2480.31,2283.46 2472.44,2283.46 2334.65,2283.46 2299.21,2318.9 2299.21,2362.2 2307.09,2370.08 2350.39,2370.08 2362.2,2358.27 2362.2,2354.33 2362.2,2326.77 2370.08,2318.9 2464.57,2318.9 2473.43,2318.9 2479.33,2324.8 2479.33,2334.65
SW on Top Layer "LT3652_SW" (solid, pour order 3): 748.03,2421.26 826.77,2421.26 866.14,2381.89 866.14,2204.72 874.02,2196.85 917.32,2196.85 1011.81,2196.85 1023.62,2196.85 1027.56,2200.79 1027.56,2299.21 1003.94,2322.83 1003.94,2677.17 984.25,2696.85 885.82,2696.85 866.14,2677.17 866.14,2598.43 826.77,2559.06 748.03,2559.06 728.35,2539.37 728.35,2440.95
SENSE on Top Layer "LT3652_SENSE" (solid, pour order 4): 1062.99,2200.79 1066.93,2196.85 1074.8,2196.85 1078.74,2200.79 1078.74,2248.03 1082.68,2251.97 1090.55,2259.84 1160.43,2259.84 1196.36,2223.92 1299.21,2223.92 1299.21,2322.83 1240.16,2381.89 1240.16,2460.63 1240.16,2515.75 1240.16,2677.17 1220.47,2696.85 1122.05,2696.85 1102.36,2677.17 1102.36,2377.95 1059.06,2334.65 1059.06,2259.84 1059.06,2251.97 1062.99,2248.03
VBAT_INT on Top Layer "LT3652_VBAT_INT" (solid, pour order 5): 1417.32,2322.83 1279.53,2185.04 1240.16,2185.04 1200.79,2145.67 1200.79,1948.82 1220.47,1929.13 1338.58,1929.13 1397.64,1988.19 1397.64,2145.67 1417.32,2165.35 1555.12,2165.35 1730.32,2165.35 1751.97,2165.35 1771.65,2185.04 1771.65,2263.78 1712.6,2322.83
VIN on Top Layer "LT3652_VIN" (solid, pour order 10): 1007.87,2086.61 1027.56,2066.93 1027.56,2023.62 1015.75,2011.81 822.83,2011.81 755.91,2078.74 657.48,2078.74 570.87,2165.35 570.87,2216.54 578.74,2224.41 633.86,2224.41 728.35,2129.92 842.52,2129.92 885.83,2086.61
GND on Bottom Layer "Bottom Layer-GND 1" (solid, pour order 7): 1427.17,2411.42 1328.74,2509.84 442.91,2509.84 393.7,2460.63 393.7,1968.5 442.91,1919.29 935.04,1919.29 1062.99,2047.24 1210.63,2047.24 1210.63,2381.89 1427.17,2381.89
GND on Bottom Layer "Bottom Layer-GND 2" (solid, pour order 8): 2215.12,2214.57 2263.78,2169.29 2755.91,2169.29 2804.57,2214.57 2804.57,2559.06 2755.91,2607.72 2263.78,2607.72 2215.12,2559.06
NetD201_1 on Bottom Layer "LT3652_VIND" (solid, pour order 11): 1555.12,2500 1594.49,2460.63 1594.49,2421.26 1555.12,2381.89 1515.75,2381.89 1476.38,2421.26 1338.58,2559.06 708.66,2559.06 688.98,2578.74 688.98,2637.8 708.66,2657.48 1397.64,2657.48

## Other copper
Top Layer:
  text "SOLENS" at 76.77,844.49 h190
  text "b y   F L U F F Y   L O G I C" at 78.74,738.19 h67.5

## Silkscreen, mask and mechanical layers (free items; w line width, h text height)
Top Overlay:
  lines w8: 88.58,1594.49 275.59,1594.49 ; 88.58,1757.87 236.22,1757.87 ; 204.72,1968.5 216.54,1968.5 216.54,1994.09 216.54,2066.93 204.72,2066.93
  lines w10: 3057.87,2551.18 3057.87,2529.53 3087.4,2529.53 ; 3235.04,2529.53 3254.72,2529.53 3254.72,2551.18 ; 3444.88,2706.69 3560.23,2591.35 ; 3631.04,2520.54 3740.16,2411.42 3769.69,2411.42 ; 4086.61,2411.42 4566.93,2411.42 ; 4881.89,2411.42 4921.26,2411.42 5108.27,2598.43 ; 5175.98,2666.14 5216.54,2706.69 ; 3560.23,2591.35 3560.23,2591.35
  text "3V3" at 3106.3,2511.81 h40
  text "GND" at 3023.62,2444.88 h40 r90
  text "GND" at 3326.77,2444.88 h40 r90
  text "GND" at 123.03,2341.54 h40
  text "GND" at 1342.52,2338.58 h40
  text "PV" at 1503.94,2338.58 h40
  text "GND" at 1618.11,2338.58 h40
  text "NTC" at 1755.91,2338.58 h40
  text "BAT" at 1897.64,2338.58 h40
  text "WIFI PROG" at 5088.58,2322.83 h40
  text "VBAT" at 1901.57,2275.59 h40
  text "DTR" at 5206.69,2244.09 h40
  text "VBI" at 1555.12,2204.72 h40
  text "RX" at 5246.06,2145.67 h40
  text "RESET" at 5137.8,2122.05 h40 r90
  text "VIN SET" at 465.55,2101.38 h40
  text "VFB" at 1555.12,2062.99 h40
  text "TX" at 5246.06,2047.24 h40
  text "RESET" at 2303.15,2027.56 h40
  text "3V3" at 3585.63,1865.16 h40
  text "VINFB" at 1385.83,1842.52 h40
  text "SHDN_EN" at 279.53,1838.58 h40 r90
  text "SWD" at 2795.28,1820.87 h40
  text "GND" at 5206.69,1746.06 h40
  text "TX" at 4748.03,1720.47 h40
  text "RX" at 4897.64,1720.47 h40
  text "CHRG" at 88.58,1702.76 h40
  text "RTS" at 5208.66,1641.73 h40
  text "UART / BRIDGE" at 3293.31,1606.3 h40
  text "FAULT" at 88.58,1535.43 h40
  text "GND" at 5062.99,1475.39 h40
  text "SPECT0" at 4152.56,1416.34 h40
  text "SPECT1" at 4416.34,1416.34 h40
  text "SDA" at 88.58,1377.95 h40
  text "SCL" at 88.58,1230.31 h40
  text "GND" at 609.25,1183.07 h40
  text "ALERT" at 86.61,1082.68 h40
  text "TX" at 228.35,570.87 h40
  text "BTN0" at 618.11,488.19 h40
  text "RX" at 240.16,429.13 h40
  text "DEBUG" at 586.61,413.39 h40
  text "LED0" at 3625,387.8 h40
  text "SDA" at 3880.91,386.81 h40
  text "SCL" at 4029.53,386.81 h40
  text "TX" at 586.61,354.33 h40
  text "RX" at 688.98,354.33 h40
  text "GND" at 1070.87,338.58 h40 r90
  text "GND" at 3543.31,285.43 h40
  text "GND" at 972.44,204.72 h40
  text "140 x 70 MM (5512 x 2756 MIL)" at 4322.83,82.68 h40
  text "PV PANEL IN: 10V - 32V / USE 6V SLA BATTERY, >4AH / ADJ VR200 FOR 2.8V @ VINFB / PV/BAT CONN IS 3.5MM PHEONIX" at 1177.17,72.49 h40
Bottom Overlay:
  drawing of 6335 lines, arcs and shapes, not listed
  text "VCC" at 4625.98,2303.15 h40
  text "IO12" at 4822.83,2303.15 h40
  text "WIFI GPIO" at 3740.16,2279.53 h40
  text "GND" at 4625.98,2244.09 h40
  text "IO14" at 4822.83,2244.09 h40
  text "BRIDGE" at 3740.16,2220.47 h40
  text "VCC" at 4625.98,2185.04 h40
  text "RXD2" at 4822.83,2185.04 h40
  text "GND" at 4625.98,2125.98 h40
  text "TXD2" at 4822.83,2125.98 h40
  text "GND" at 4625.98,2066.93 h40
  text "IO0" at 4822.83,2066.93 h40
  text "GND" at 4625.98,2007.87 h40
  text "IO2" at 4822.83,2007.87 h40
  text "VFB / RF3" at 1197.42,1987.02 h40
  text "WIFI / PWR EN" at 3750,1929.13 h40
  text "TIMER / EOC SET" at 1206.53,1846.46 h40
  text "WIFI / GPIO" at 4732.28,1846.46 h40
  text "VFLOAT / TEMPCO" at 1643.7,1820.87 h40
  text "SWO" at 3374.02,1799.21 h40 r270
  text "NRST" at 3271.65,1755.91 h40 r270
  text "SWDIO" at 3185.04,1723.43 h40 r270
  text "SWCLK" at 2972.44,1716.54 h40 r270
  text "PERIPH / PWR EN" at 938.81,1535.43 h40
  text "SPECT / PWR" at 4256.89,1492.13 h40
  text "Ben Heberlein" at 931.1,1234.25 h120
  text "Jeffery Lim" at 931.1,1116.14 h120
  text "Taylor Nguyen" at 931.1,998.03 h120
  text "GND" at 4007.87,885.83 h40 r270
  text "GND" at 4106.3,885.83 h40 r270
  text "3V3" at 3713.26,884.84 h40 r270
  text "GND" at 3813.34,884.84 h40 r270
  text "GND" at 4208.66,884.84 h40 r270
  text "GND" at 3611.22,883.86 h40 r270
  text "GND" at 4309.06,883.86 h40 r270
  text "3V3" at 3905.51,881.89 h40 r270
  text "Jeremy Rapp" at 931.1,879.92 h120
  text "140 MM" at 2885.83,823.82 h30
  text "130 MM" at 2886.81,762.8 h30
  text "Akira Youngblood" at 931.1,761.81 h120
  text "70 MM" at 2523.62,656.5 h30
  text "60 MM" at 2694.88,656.5 h30
  text "MCU / GPIO" at 3566.93,637.8 h40
  text "95 MM" at 2813.98,549.21 h30
  text "DIMENSIONS" at 2933.07,485.24 h30
  text "MCO2" at 4452.76,480.31 h40
  text "EXTRA UART" at 541.34,423.23 h40
  text "RX" at 856.3,410.18 h40
  text "LED3" at 3610.24,374.02 h40 r270
  text "LED2" at 3712.6,374.02 h40 r270
  text "LED1" at 3811.02,374.02 h40 r270
  text "LED0" at 3909.45,374.02 h40 r270
  text "PB15" at 4007.87,374.02 h40 r270
  text "PB14" at 4110.24,374.02 h40 r270
  text "PB13" at 4212.6,374.02 h40 r270
  text "GND" at 492.13,350.39 h40
  text "GND" at 492.13,251.97 h40
  text "TX" at 858.27,192.91 h40
  text "7" at 4147.64,162.4 h40
  text "6" at 4343.5,162.4 h40
  text "5" at 4540.35,162.4 h40
  text "4" at 4737.2,162.4 h40
  text "3" at 4935.04,162.4 h40
  text "2" at 5130.91,162.4 h40
  text "1" at 5320.87,162.4 h40
  text "MM" at 5433.07,157.48 h40
  text "USE M3x0.5 SCREWS" at 3776.66,81.61 h40
Top Solder:
  lines w8: 82.68,807.09 744.09,807.09
  text "HC SVNT / DRACONES" at 4251.97,2417.32 h20
  text "SOLENS" at 76.77,844.49 h190
  text "b y   F L U F F Y   L O G I C" at 78.74,738.19 h67.5
Mechanical 1:
  lines w4: 0,98.43 ccw(c98.43,98.43) 98.43,0 5413.39,0 ccw(c5413.39,98.43) 5511.81,98.43 5511.81,2657.48 ccw(c5413.39,2657.48) 5413.39,2755.91 98.43,2755.91 ccw(c98.43,2657.48) 0,2657.48 0,98.43
  lines w10: 0,1771.65 1456.69,1771.65 1673.23,1988.19 1830.71,1988.19 1912.4,2069.88 2011.81,2169.29 2850.39,2169.29 3370.08,2169.29 3405.51,2204.72 3405.51,2460.63 3405.51,2578.74 3405.51,2755.91
Mechanical 15:
  lines w10: 78.74,393.7 78.74,2362.2 ; 393.7,78.74 3740.16,78.74 ; 393.7,2677.17 5118.11,2677.17 ; 4133.86,78.74 5354.33,78.74 5433.07,157.48 5433.07,2362.2

## Text inside footprints (layer, text, board x,y; h text height)
J600: Top Overlay "SCL" at 4934.33,334.96 h35; Top Overlay "SDA" at 5084.33,389.96 h35; Top Overlay "OV5642" at 4624.33,1294.96 h60; Top Overlay "PWDN" at 4974.33,1054.96 h35; Top Overlay "VCC" at 4944.33,249.96 h35; Top Overlay "VSYNC" at 4874.21,449.88 h35; Top Overlay "D7" at 5044.33,744.96 h35; Top Overlay "D9" at 4974.33,644.96 h35; Top Overlay "PCLK" at 4909.33,544.96 h35; Top Overlay "D3" at 5044.33,944.96 h35; Top Overlay "D5" at 5044.33,844.96 h35; Top Overlay "D4" at 5129.33,894.96 h35; Top Overlay "D2" at 5129.33,999.96 h35; Top Overlay "XCLK" at 5059.33,599.96 h35; Top Overlay "D8" at 5129.33,694.96 h35; Top Overlay "D6" at 5129.33,799.96 h35; Top Overlay "HREF" at 5059.33,494.96 h35; Top Overlay "GND" at 5094.33,294.96 h35; Top Overlay "1" at 5354.33,206.69 h40; Top Overlay "2" at 5242.13,206.69 h40; Top Overlay "19" at 5324.8,1289.37 h40; Top Overlay "20" at 5216.54,1289.37 h40
U700: Top Overlay "ESP-12-E" at 4101,2077.2 h60; Mechanical 13 "ANTENNA AREA" at 4018.91,2703.15 h10; Mechanical 13 "CUTOUT POLYGON" at 4018.91,2683.15 h10